# EAGLE board temp sensor (EAGLE 9.5.2)
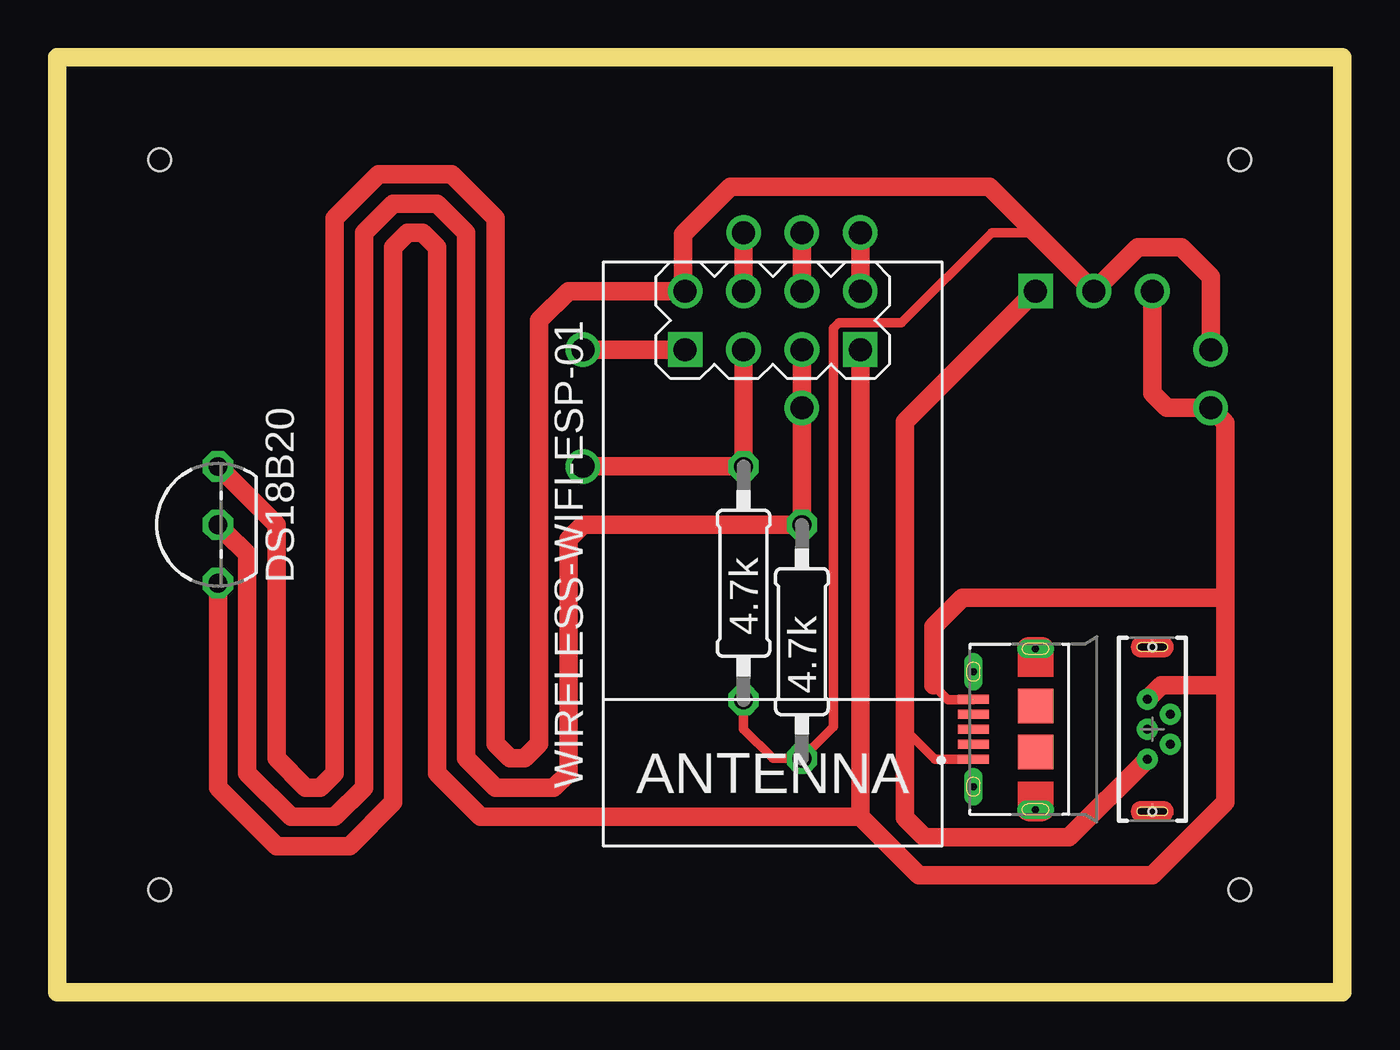
[diagram p0: board, top side]
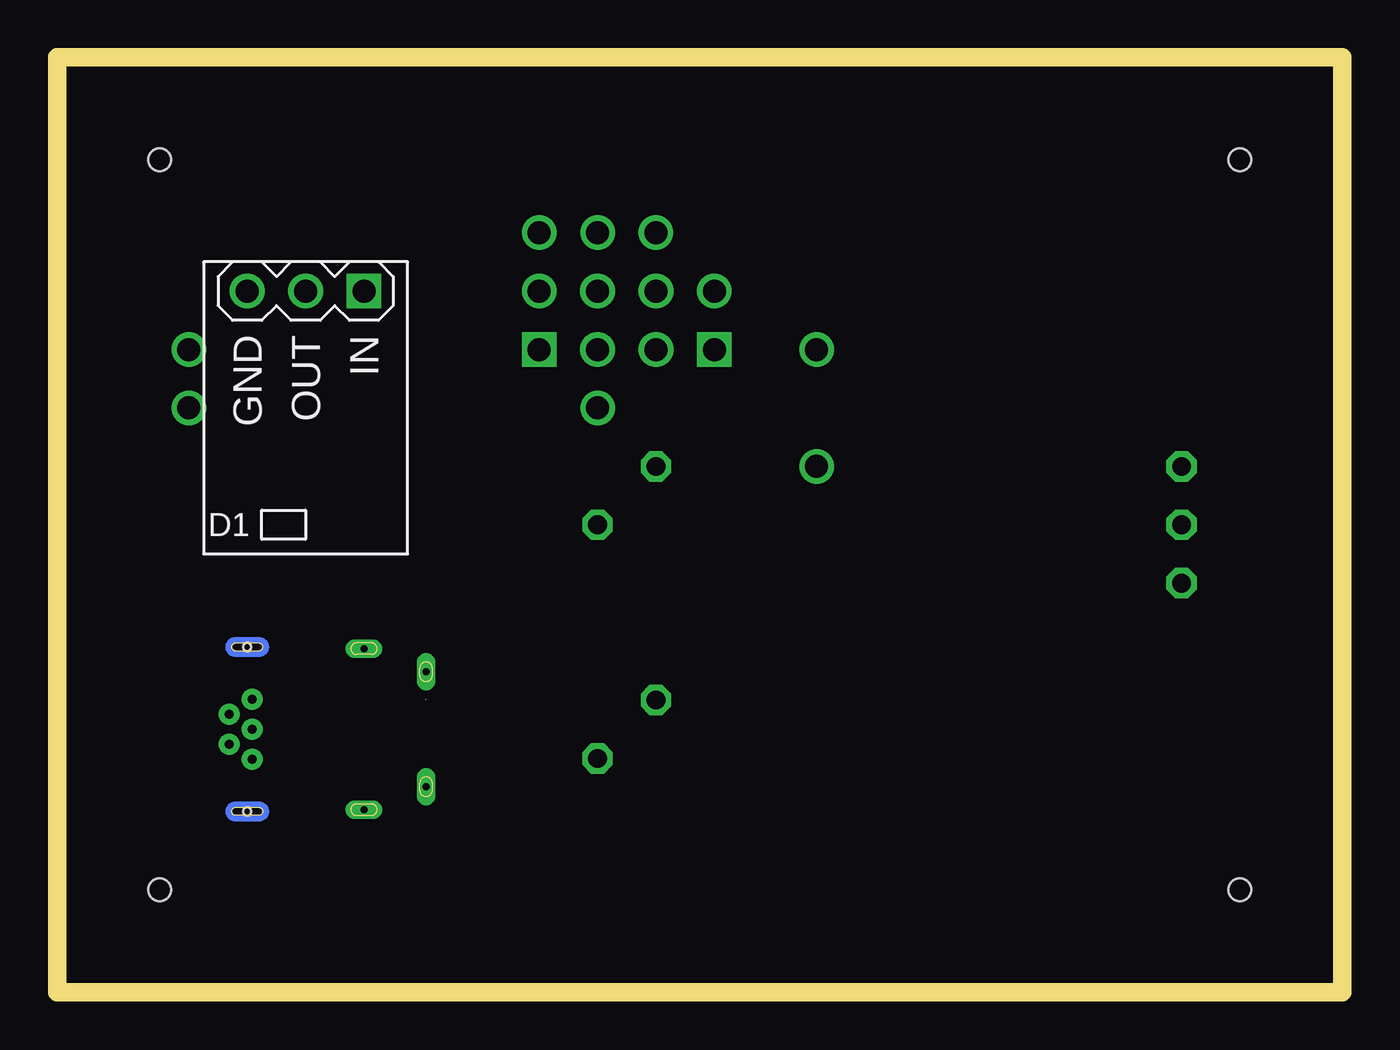
[diagram p1: board, bottom side, seen from below]

Size 55.88 x 40.64 mm. Coordinates in mm from the lower left corner, seen from the top.
Outline: 0,0 0,40.64 55.88,40.64 55.88,0 0,0
Copper layers (1*16): Top 0.035mm / dielectric 1.5mm / Bottom 0.035mm
Design rules "temp sensor": minimum track width 10mil, minimum drill 24mil, track to track 0.205mm, track to pad 0.205mm, pad to pad 0.205mm, via to via 0.205mm, smd to smd 8mil, copper to edge 40mil, drill to drill 8mil, minimum pad ring 10mil, minimum via ring 8mil, stop-mask expansion 4mil, vias tented up to drill 0mil, thermal gap 10mil
Net classes: 0 default: clearance 0.205 mm
Holes 1 mm at 4.45,36.2 4.45,4.45 51.44,4.45 51.44,36.2

## Footprints (pad centres in the part's own frame; a part is rotated, then mirrored left to right if it is on the bottom)
TO92- = drill 0.813 octagon: 1 -2.54,0; 2 0,0; 3 2.54,0
GCT_USB3131-XX-0230-X_REVB = drill 0.4 pad 0.9: 1 -1.3,0.22; 2 -0.65,-0.78; 3 0,0.22; 4 0.65,-0.78; 5 1.3,0.22 | smd 0.1 x 0.1: 6 -3.275,0; 7 3.875,0 | hole 0.35: -3.575,0; 3.575,0
AMPHENOL_10118194-0001LF = smd 0.4 x 1.35: 1 -1.3,2.7; 2 -0.65,2.7; 3 0,2.7; 4 0.65,2.7; 5 1.3,2.7 | drill 0.305 pad 0.635 long: S1 -2.5,2.7; S2 2.5,2.7 | drill 0.305 pad 0.787 long: S3 -3.5,0; S6 3.5,0 | smd 1.5 x 1.55: S4 -1,0; S5 1,0
0207/10 = drill 0.813 octagon: 1 -5.08,0; 2 5.08,0
WIRELESS-WIFI-ESP-01 = drill 1 square: A1 -8.89,3.81; D1 -8.89,-3.81 | drill 1: A2 -11.43,3.81; B1 -8.89,1.27; B2 -11.43,1.27; C1 -8.89,-1.27; C2 -11.43,-1.27; D2 -11.43,-3.81
REG-AMS1117-3P = drill 1 square: 1 -2.54,-5.08 | drill 1: 2 0,-5.08; 3 2.54,-5.08

## Placement (x,y rotation side)
IC1  DS18B20  [TO92-]  6.99,20.32 90 top
J1  USB3131-XX-0230-X_REVB  [GCT_USB3131-XX-0230-X_REVB]  47.62,11.43 90 top
J4  10118194-0001LF  [AMPHENOL_10118194-0001LF]  42.55,11.43 90 top
R1  4.7k  [0207/10]  29.84,17.78 90 top
R2  4.7k  [0207/10]  32.38,15.24 90 top
U$1  WIRELESS-WIFI-ESP-01  [WIRELESS-WIFI-ESP-01]  31.11,19.05 270 top
U$2  REG-AMS1117-3P-3.3V  [REG-AMS1117-3P]  45.09,25.4 180 bottom

## Library data of the parts
IC1 = 1wire
J1 = USB3131-XX-0230-X_REVB; DESCRIPTION: USB - micro B USB 2.0 Receptacle Connector 5 Position Through Hole; DIGI-KEY_PART_NUMBER: 2073-USB3131-30-0230-ACT-ND; DIGI-KEY_PURCHASE_URL: https://www.digikey.com/product-detail/en/gct/USB3131-30-0230-A/2073-USB3131-30-0230-ACT-ND/9859713?utm_source=snapeda&utm_medium=aggregator&utm_campaign=symbol; MF: Global Connector Technology; MP: USB3131-30-0230-A; PACKAGE: None
J4 = 10118194-0001LF.3; DESCRIPTION: USB - micro B USB 2.0 Receptacle Connector 5 Position Surface Mount, Right Angle; Through Hole; DIGI-KEY_PART_NUMBER: 609-4618-1-ND; DIGI-KEY_PURCHASE_URL: https://www.digikey.com/product-detail/en/amphenol-icc-fci/10118194-0001LF/609-4618-1-ND/2785382?utm_source=snapeda&utm_medium=aggregator&utm_campaign=symbol; MF: Amphenol ICC; MP: 10118194-0001LF; PACKAGE: None
R1 R2 = resistor
U$1 U$2 = diy-modules

## Nets
3.3V: IC1.3 R1.1 R2.1 U$1.D2 U$2.2
5V: J1.1 J4.1 U$2.1
CHP: U$1.B2
GND: IC1.1 J1.5 J4.5 U$1.A1 U$2.3
GPIO0: R1.2 U$1.C1
GPIO2: IC1.2 R2.2 U$1.B1
RST: U$1.C2
RX: U$1.D1
TX: U$1.A2

## Tracks (layer width: path | path; a pad name or v marks a point on that pad's centre or on a via)
3.3V  (via drill 1)
  Top 0.406: U$2.2 42.55,33.02 40.64,33.02 36.72,29.1 34,29.1 33.76,28.86 33.76,11.54 R2.1 31.11,10.16 29.84,11.43 R1.1
  Top 0.813: IC1.3 9.53,20.32 9.53,10.16 10.79,8.89 11.43,8.89 12.06,9.53 12.06,33.66 13.97,35.56 17.14,35.56 19.05,33.66 19.05,10.79 19.68,10.16 20.32,10.16 20.95,10.79 20.95,29.21 22.23,30.48 U$1.D2 27.21,30.57 27.21,32.95 29.28,35.02 40.55,35.02 U$2.2 46.99,32.38 48.9,32.38 50.16,31.11 v50.16,27.94
5V
  Top 0.406: J4.1 38.16,10.13 36.86,11.43
  Top 0.813: U$2.1 36.86,24.8 36.86,11.43 36.86,7.59 37.72,6.73 44.01,6.73 J1.1
CHP  (via drill 1)
  Top 0.813: U$1.B2 v32.38,33.02
GND  (via drill 1)  (1 unrouted)
  Top 0.406: 38.1,13.34 38.73,12.71 39.84,12.71
  Top 0.813: U$1.A1 34.92,7.62 | U$2.3 47.62,26.04 48.26,25.4 v50.16,25.4 50.8,24.77 50.8,17.14 | 34.92,7.62 18.41,7.62 16.51,9.53 16.51,32.38 15.88,33.02 15.24,33.02 14.61,32.38 14.61,8.26 12.7,6.35 9.53,6.35 6.99,8.89 IC1.1 | 50.8,17.14 50.8,13.34 | 50.8,13.34 50.8,8.26 47.62,5.08 37.47,5.08 34.92,7.62 | J1.5 48.01,13.34 50.8,13.34 | 50.8,17.14 39.37,17.14 38.1,15.88 38.1,13.34
GPIO0  (via drill 1)
  Top 0.813: U$1.C1 R1.2 v22.86,22.86
GPIO2  (via drill 1)
  Top 0.813: U$1.B1 v32.38,25.4 R2.2 22.86,20.32 22.23,19.68 22.23,9.53 21.59,8.89 19.05,8.89 17.78,10.16 17.78,33.02 16.51,34.29 14.61,34.29 13.34,33.02 13.34,8.89 12.06,7.62 10.16,7.62 8.26,9.53 8.26,17.25 8.26,19.05 7.3,20 IC1.2
RST  (via drill 1)
  Top 0.813: U$1.C2 v29.84,33.02
RX  (via drill 1)
  Top 0.813: U$1.D1 v22.86,27.94
TX  (via drill 1)
  Top 0.813: U$1.A2 v34.92,33.02